# Altium PCB CODEC.PcbDoc
Units mm, origin at the board's own origin, x right, y up, seen from the top; angles counter-clockwise.
Board outline 50.67 x 46.74 mm, 2 copper layers (Top Layer, Bottom Layer); 25 components, 21 nets, 86 pads, 3 vias.
Unrouted connection lines stored in the file: 5.
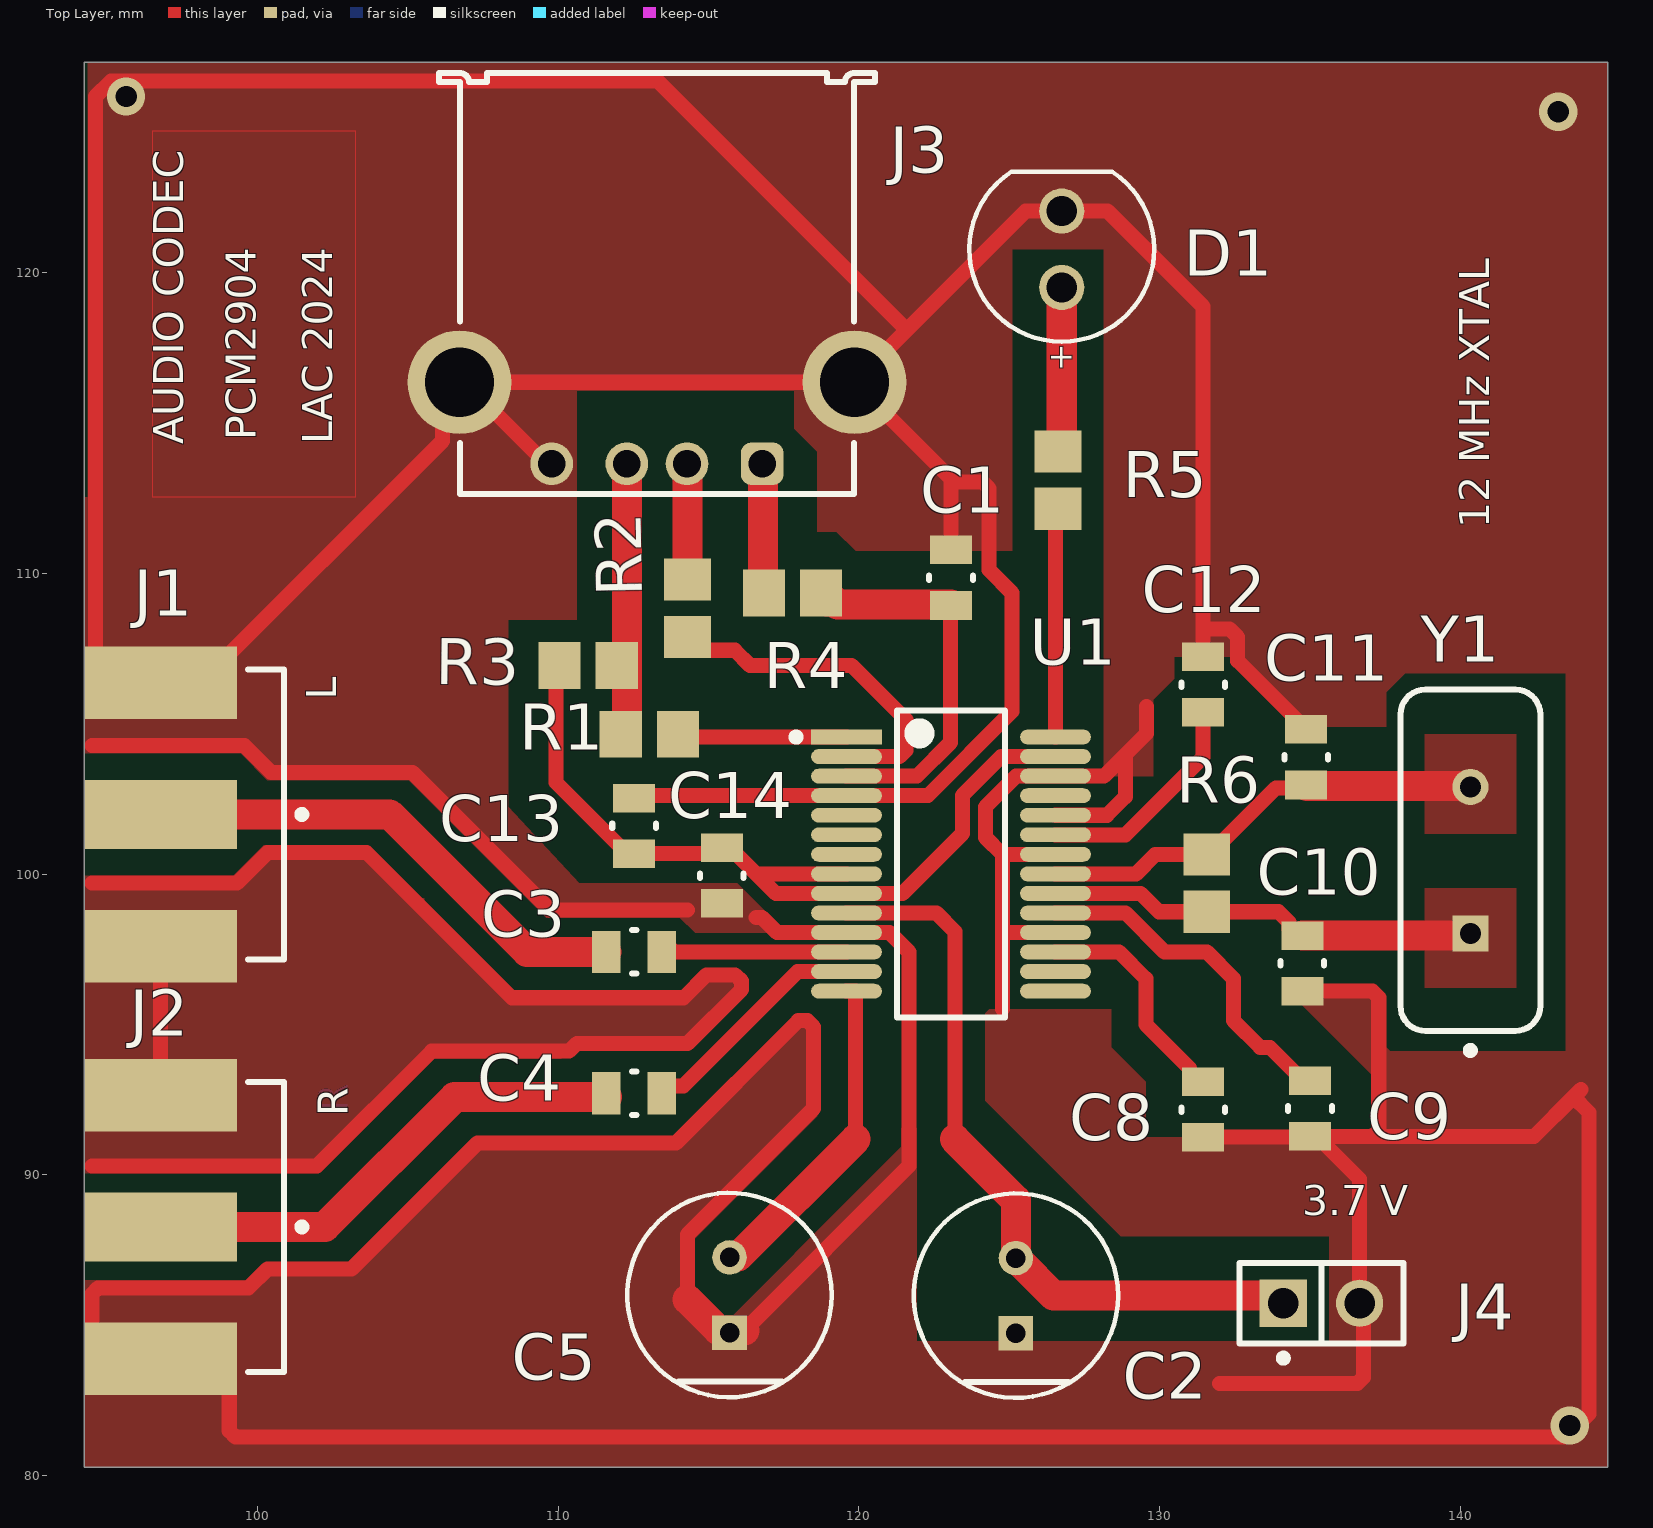
[diagram p0: Top Layer view]
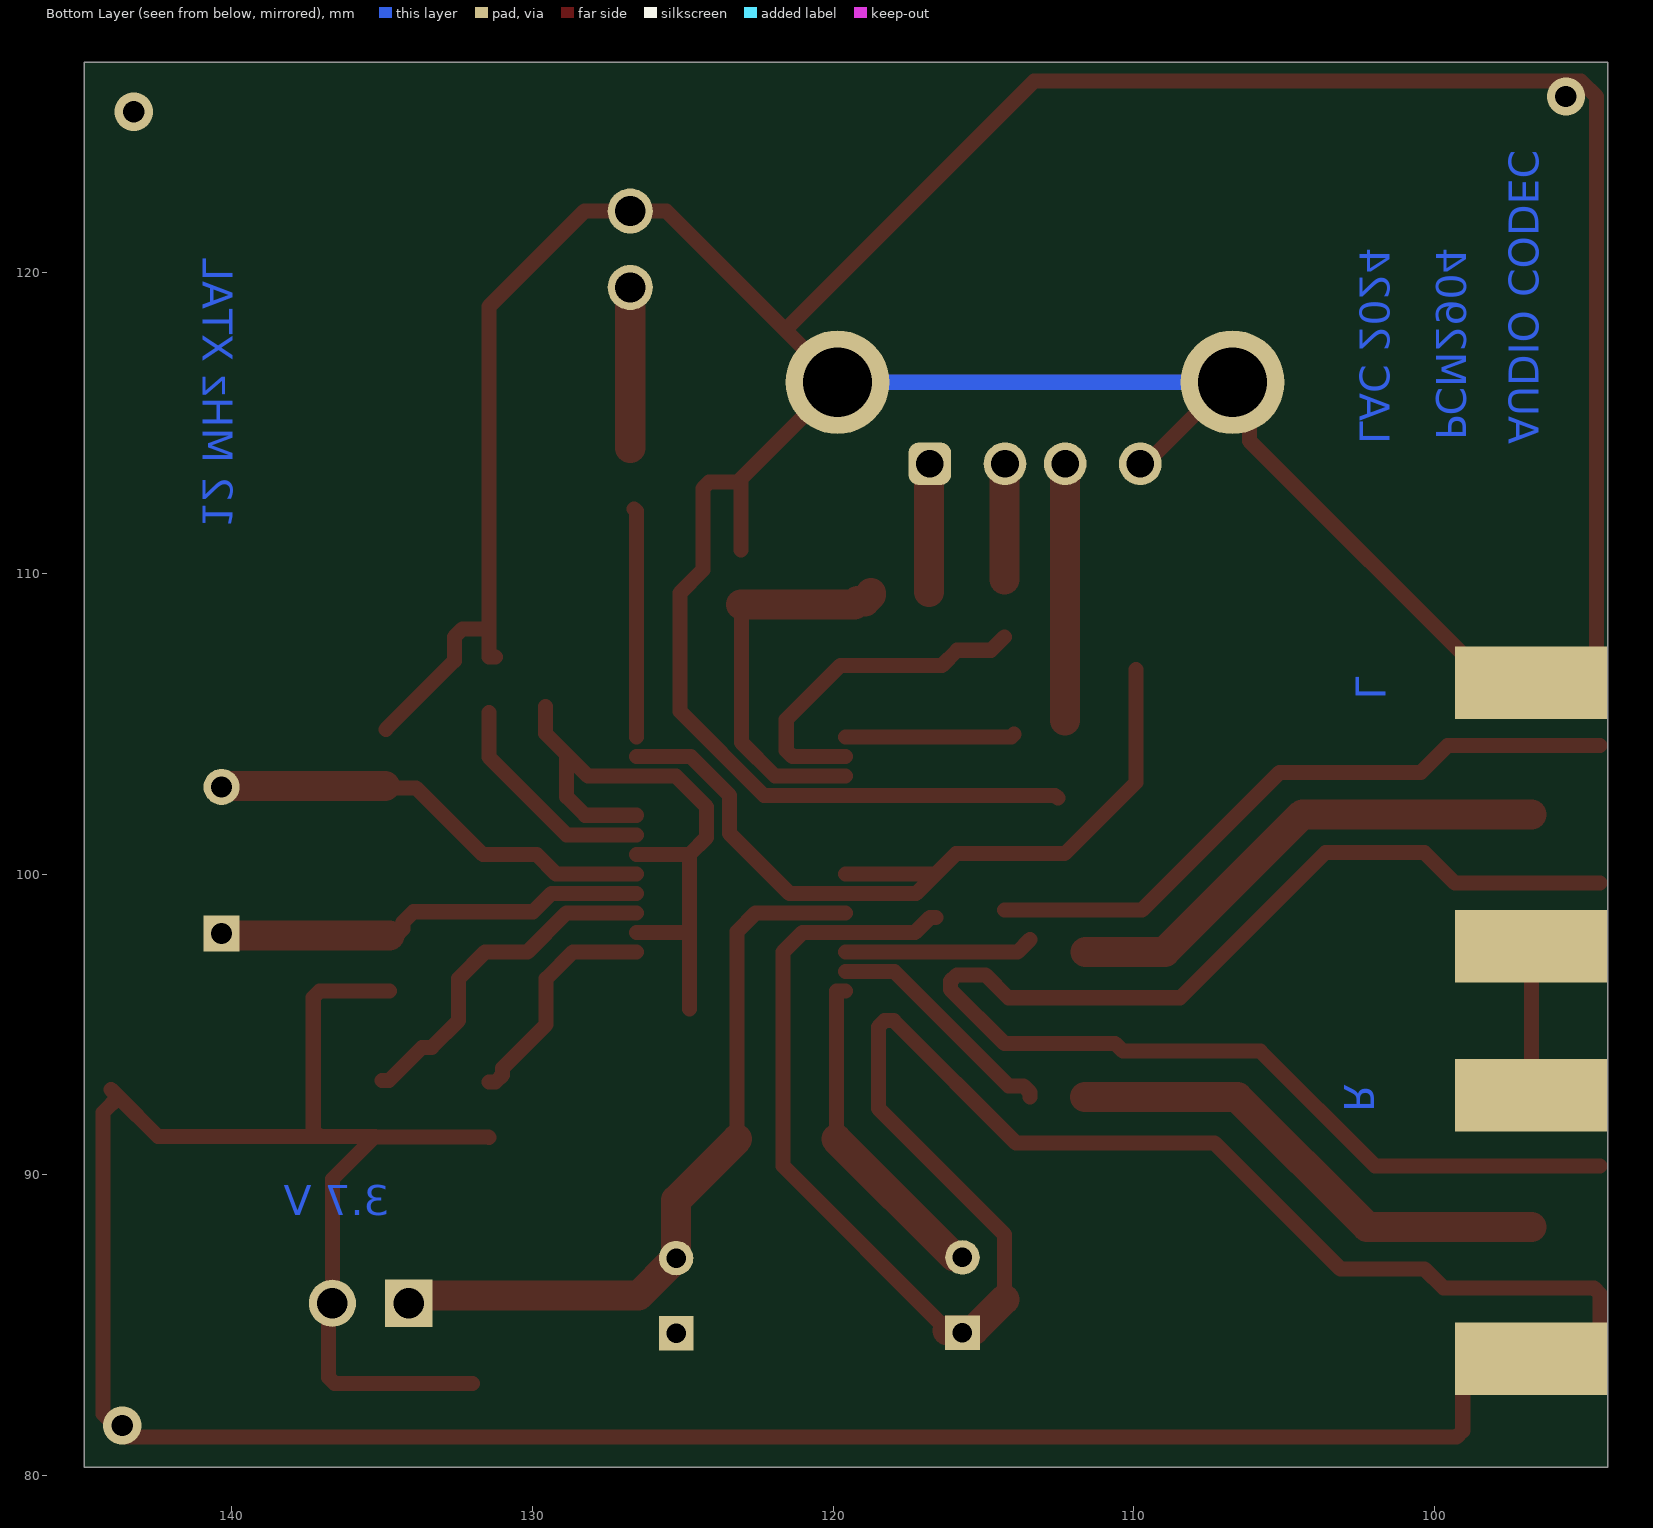
[diagram p1: Bottom Layer view, seen from below]
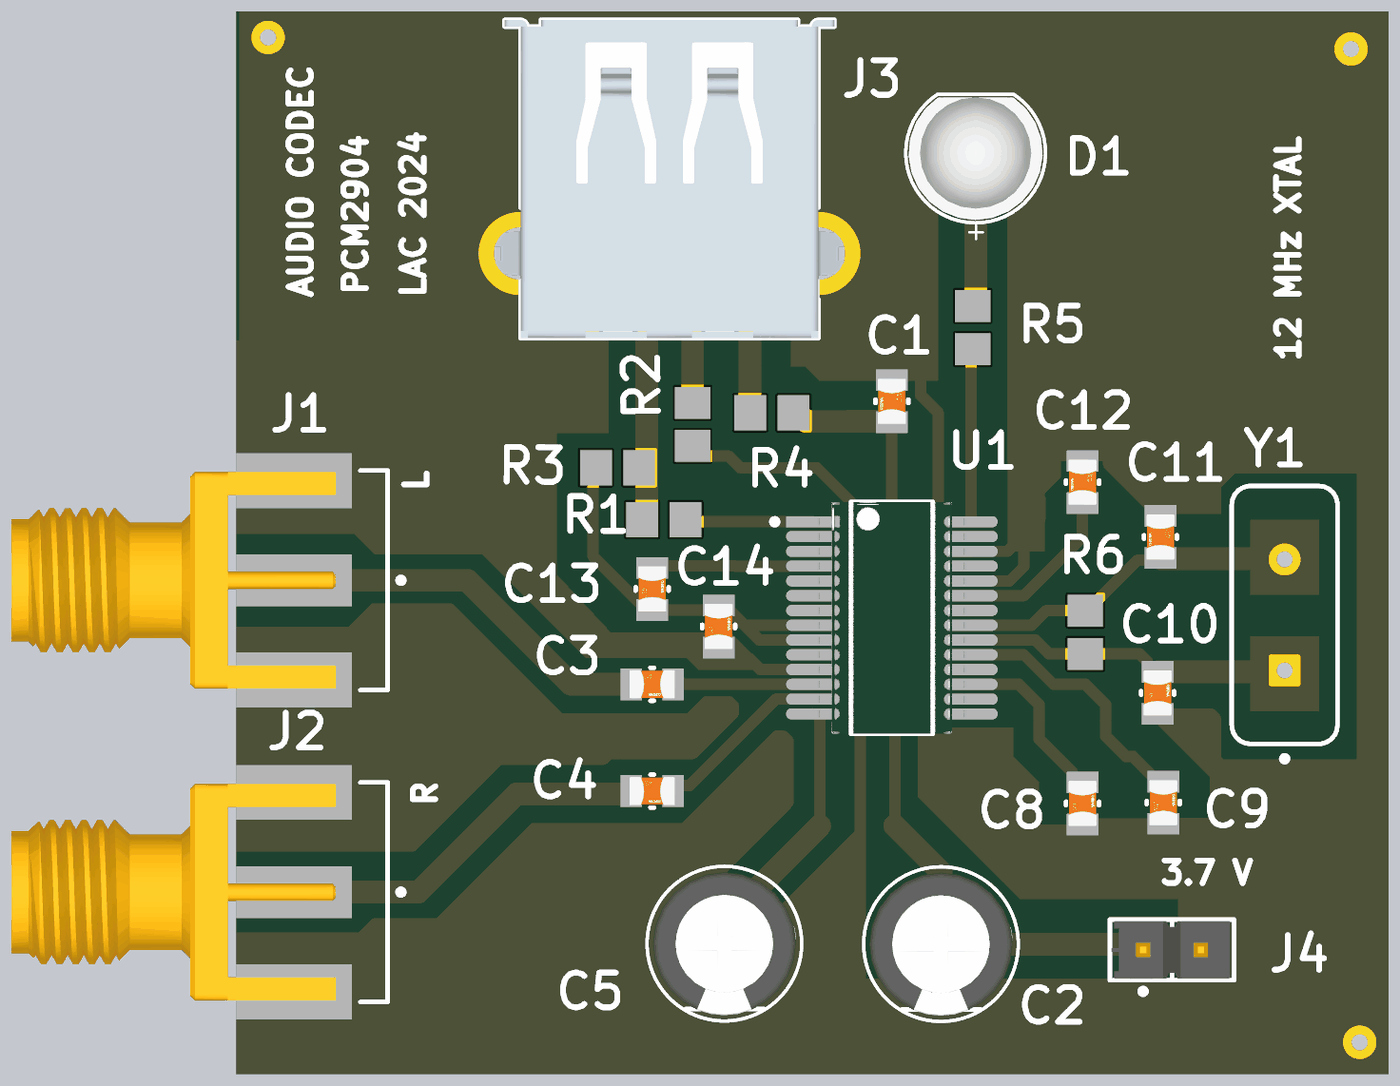
[diagram p2: 3D render of the assembled board from above, using the file's embedded part models]

## Layer stack, top to bottom
Top Solder: solder mask 0.0102, Solder Resist, Dk 3.5
Top Layer: signal copper 0.0356
Dielectric 1: dielectric 0.32, FR-4, Dk 4.8
Bottom Layer: signal copper 0.0356
Bottom Solder: solder mask 0.0102, Solder Resist, Dk 3.5

## Board outline
94.234,80.264 144.907,80.264 144.907,127 94.234,127

## Design rules (kind name [scope] priority, off if disabled: settings)
Clearance Clearance_2 [(ExistsOnLayer('Top Layer') Or ExistsOnLayer('Bottom Layer')) vs (ExistsOnLayer('Top Layer') Or ExistsOnLayer('Bottom Layer'))] p1: gap=0.254 ignorepadtopadclearanceinfootprint=TRUE except(0: Track-Hole SMDPad-Hole THPad-Hole Via-Hole Fill-Hole Poly-Hole Region-Hole Text-Hole; 0.15: Arc-Arc Arc-Track Arc-SMDPad Arc-THPad Arc-Via Arc-Fill Arc-Poly Arc-Region Arc-Text Arc-Hole Track-Track Track-SMDPad Track-THPad Track-Via Track-Fill Track-Poly Track-Region Track-Text)
Clearance [All] p2: gap=0.254 ignorepadtopadclearanceinfootprint=FALSE except(0: Arc-Hole Track-Hole SMDPad-Hole THPad-Hole Via-Hole Fill-Hole Poly-Hole Region-Hole Text-Hole)
HoleToHoleClearance [All] p1: gap=0.2 allowstackedmicrovias=TRUE
MinimumSolderMaskSliver [All] p1: minsoldermaskwidth=0.127
PolygonConnect PolygonConnect_18 [All vs IsNamedPolygon('NETC11_2_L01_P014')] p1: connectstyle=Direct reliefconductorwidth=0.254 reliefentries=4 polygonreliefangle="90 Angle" airgapwidth=0.254
PolygonConnect PolygonConnect_17 [All vs IsNamedPolygon('NETC10_2_L01_P015')] p2: connectstyle=Direct reliefconductorwidth=0.254 reliefentries=4 polygonreliefangle="90 Angle" airgapwidth=0.254
PolygonConnect PolygonConnect_16 [All vs IsNamedPolygon('GND_L01_P013')] p3: connectstyle=Direct reliefconductorwidth=0.254 reliefentries=4 polygonreliefangle="90 Angle" airgapwidth=0.254
PolygonConnect PolygonConnect_15 [All vs IsNamedPolygon('GND_L01_P008')] p4: connectstyle=Direct reliefconductorwidth=0.254 reliefentries=4 polygonreliefangle="90 Angle" airgapwidth=0.254
PolygonConnect PolygonConnect_14 [All vs IsNamedPolygon('GND_L01_P003')] p5: connectstyle=Direct reliefconductorwidth=0.254 reliefentries=4 polygonreliefangle="90 Angle" airgapwidth=0.254
PolygonConnect PolygonConnect_13 [All vs IsNamedPolygon('GND_L01_P007')] p6: connectstyle=Direct reliefconductorwidth=0.254 reliefentries=4 polygonreliefangle="90 Angle" airgapwidth=0.254
PolygonConnect PolygonConnect_12 [All vs IsNamedPolygon('GND_L01_P001')] p7: connectstyle=Direct reliefconductorwidth=0.254 reliefentries=4 polygonreliefangle="90 Angle" airgapwidth=0.254
PolygonConnect PolygonConnect_11 [All vs IsNamedPolygon('GND_L01_P000')] p8: connectstyle=Direct reliefconductorwidth=0.254 reliefentries=4 polygonreliefangle="90 Angle" airgapwidth=0.254
PolygonConnect PolygonConnect_10 [All vs IsNamedPolygon('GND_L01_P009')] p9: connectstyle=Direct reliefconductorwidth=0.254 reliefentries=4 polygonreliefangle="90 Angle" airgapwidth=0.254
PolygonConnect PolygonConnect_9 [All vs IsNamedPolygon('GND_L01_P006')] p10: connectstyle=Direct reliefconductorwidth=0.254 reliefentries=4 polygonreliefangle="90 Angle" airgapwidth=0.254
PolygonConnect PolygonConnect_8 [All vs IsNamedPolygon('GND_L01_P006')] p11: connectstyle=Direct reliefconductorwidth=0.254 reliefentries=4 polygonreliefangle="90 Angle" airgapwidth=0.254
PolygonConnect PolygonConnect_7 [All vs IsNamedPolygon('GND_L01_P006')] p12: connectstyle=Direct reliefconductorwidth=0.254 reliefentries=4 polygonreliefangle="90 Angle" airgapwidth=0.254
PolygonConnect PolygonConnect_6 [All vs IsNamedPolygon('GND_L01_P004')] p13: connectstyle=Direct reliefconductorwidth=0.254 reliefentries=4 polygonreliefangle="90 Angle" airgapwidth=0.254
PolygonConnect PolygonConnect_5 [All vs IsNamedPolygon('GND_L01_P004')] p14: connectstyle=Direct reliefconductorwidth=0.254 reliefentries=4 polygonreliefangle="90 Angle" airgapwidth=0.254
PolygonConnect PolygonConnect_4 [All vs IsNamedPolygon('GND_L01_P002')] p15: connectstyle=Direct reliefconductorwidth=0.254 reliefentries=4 polygonreliefangle="90 Angle" airgapwidth=0.254
PolygonConnect PolygonConnect_3 [All vs IsNamedPolygon('GND_L01_P002')] p16: connectstyle=Direct reliefconductorwidth=0.254 reliefentries=4 polygonreliefangle="90 Angle" airgapwidth=0.254
PolygonConnect PolygonConnect_2 [All vs IsNamedPolygon('GND_L01_P009')] p17: connectstyle=Direct reliefconductorwidth=0.254 reliefentries=4 polygonreliefangle="90 Angle" airgapwidth=0.254
PolygonConnect PolygonConnect_1 [All vs IsNamedPolygon('GND_L01_P000')] p18: connectstyle=Direct reliefconductorwidth=0.254 reliefentries=4 polygonreliefangle="90 Angle" airgapwidth=0.254
PolygonConnect [All] p19: connectstyle=Relief reliefconductorwidth=0.254 reliefentries=4 polygonreliefangle="90 Angle" airgapwidth=0.254
RoutingVias [All] p1: holewidth=0.711 width=1.27 viastyle="Through Hole" minholewidth=0.711 minwidth=1.27 maxholewidth=0.711 maxwidth=1.27
SilkToSilkClearance [All] p1: silktosilkclearance=0.5
SilkToSolderMaskClearance [IsPad] p1: minsilkscreentomaskgap=0.2 clearancetoexposedcopper=TRUE
SolderMaskExpansion [All] p1: expansion=0.102 istentingtop=FALSE
Width MaxMinWidth_1 [All] p1: maxlimit=2 minlimit=0.2 preferedwidth=0.5 minimp=50.000000 maximp=50.000000 favimp=50.000000
Width [All] p2: maxlimit=0.254 minlimit=0.254 preferedwidth=0.254
26 further rules are at their usual default settings.

## Components (designator, comment, footprint, x,y, rotation, side; value= is the part's Value field where it differs from the comment)
C1 "1 uF" FP-CC0805-0_85-MFG 123.063,109.855 r270 top value="100 nF"
C2 "10 uF" FP-RAD-TH-D_6_3_0_5-L_7_1-MFG 125.222,85.979 r90 top
C3 "1 uF" FP-CC0805-0_85-MFG 112.522,97.409 r0 top value="100 nF"
C4 "1 uF" FP-CC0805-0_85-MFG 112.522,92.71 r0 top value="100 nF"
C5 "10 uF" FP-RAD-TH-D_6_3_0_5-L_7_1-MFG 115.697,85.999 r90 top
C8 "1 uF" FP-CC0805-0_85-MFG 131.445,92.166 r90 top value="100 nF"
C9 "1 uF" FP-CC0805-0_85-MFG 135.001,92.202 r90 top value="100 nF"
C10 "10 pF" FP-CC0805-0_85-MFG 134.747,97.028 r90 top value="100 nF"
C11 "10 pF" FP-CC0805-0_85-MFG 134.874,103.886 r270 top value="100 nF"
C12 "1 uF" FP-CC0805-0_85-MFG 131.445,106.299 r270 top value="100 nF"
C13 "1 uF" FP-CC0805-0_85-MFG 112.522,101.6 r90 top value="100 nF"
C14 "1 uF" FP-CC0805-0_85-MFG 115.443,99.949 r90 top value="100 nF"
D1 "151051BS04000" WL-TMRC_D5.9H8.7 126.746,120.777 r90 top
J1 "142-0701-801" FP-142-0701-801-MFG 93.497,101.981 r180 top
J2 "142-0701-801" FP-142-0701-801-MFG 93.497,88.265 r180 top
J3 "61400416021" 61400416021 113.284,119.634 r180 top
J4 "TSW-102-14-G-S" FP-TSW-102-14-G-S-MFG 135.382,85.725 r0 top
R1 "22 Ohm" RESC2013X60X40ML20T25 113.03,104.648 r0 top
R2 "22 Ohm" RESC2013X60X40ML20T25 114.3,108.839 r90 top
R3 "1.5 KOhm" RESC2013X60X40ML20T25 110.998,106.934 r0 top
R4 "2.2" RESC2013X60X40ML20T25 117.79,109.347 r0 top
R5 "1K Ohm" RESC2013X60X40ML20T25 126.619,113.096 r270 top
R6 "1 MOhm" RESC2013X60X40ML20T25 131.572,99.695 r270 top
U1 "PCM2904DB" FP-DB0028A-IPC_A 123.063,100.33 r0 top
Y1 "12 MHz" FOX-FOXSLF160-20 140.335,100.457 r90 top

## Footprints (in the part's own frame and the unit in brackets; to place one, negate y for a bottom-side part, rotate by r counter-clockwise, add the part's x,y. Pads: shape width x height; smd on the part's side, far side on the other; paste and mask are expansions set on the pad)
61400416021 [mm] "USB 2.0 Type A Horizontal"
  rrect50% 1.42x1.42 hole 0.92: 1(-3.5,5.99)
  round 1.42 hole 0.92: 2(-1,5.99) 3(1,5.99) 4(3.5,5.99)
  round 3.45 hole 2.3: Shell(-6.57,3.28) Shell(6.57,3.28)
  silkscreen extent -7.25,-7 7.25,7, body extent -8,-7 8,7, height 7.63
FOX-FOXSLF160-20 [mm] "THD, 2-Leads, Body 11.35x4.65mm"
  rect 1.2x1.2 hole 0.7: 1(-2.44,0)
  round 1.2 hole 0.7: 2(2.44,0)
  silkscreen extent -6.45,-2.32 5.68,2.32, body extent -5.67,-2.32 5.68,2.33, height 3.6
FP-142-0701-801-MFG [mil]
  rect 200x90 smd paste+0 mask+0: 1(-129,0)
  rect 200x95 smd paste+0 mask+0: 2(-129,172.5) 3(-129,-172.5)
  rect 200x95 smd far side paste+0 mask+0: 2(-129,172.5) 3(-129,-172.5)
  silkscreen extent -319,-190 -244,190, body extent -295,-224 295,224, height 10
FP-CC0805-0_85-MFG [mm]
  rect 0.95x1.4 smd paste+0 mask+0: 1(-0.925,0) 2(0.925,0)
  silkscreen extent -0.08,-0.72 0.08,0.72, body extent -1.6,-1.05 1.6,1.05, height 0.25
FP-DB0028A-IPC_A [mm]
  rect 2.353x0.495 smd paste+0 mask+0: 1(-3.475,4.225)
  rrect100% 2.353x0.495 smd paste+0 mask+0: 2(-3.475,3.575) 3(-3.475,2.925) 4(-3.475,2.275) 5(-3.475,1.625) 6(-3.475,0.975) 7(-3.475,0.325) 8(-3.475,-0.325) 9(-3.475,-0.975) 10(-3.475,-1.625) 11(-3.475,-2.275) 12(-3.475,-2.925) 13(-3.475,-3.575) 14(-3.475,-4.225) 15(3.475,-4.225) 16(3.475,-3.575) 17(3.475,-2.925) 18(3.475,-2.275) 19(3.475,-1.625) 20(3.475,-0.975) 21(3.475,-0.325) 22(3.475,0.325) 23(3.475,0.975) 24(3.475,1.625) 25(3.475,2.275) 26(3.475,2.925) 27(3.475,3.575) 28(3.475,4.225)
  silkscreen extent -5.28,-5.1 1.8,5.1, body extent -5.15,-5.6 5.15,5.6, height 0.25
FP-RAD-TH-D_6_3_0_5-L_7_1-MFG [mm]
  rect 1.15x1.15 hole 0.65 paste-2539.97 mask+0: 1(-1.25,0)
  round 1.15 hole 0.65 paste-2539.97 mask+0: 2(1.25,0)
  silkscreen extent -3.4,-3.4 3.4,3.4, body extent -3.5,-3.5 3.5,3.5, height 0.25
FP-TSW-102-14-G-S-MFG [mm]
  rect 1.57x1.57 hole 1.02 paste-2539.97 mask+0: 1(-1.27,0)
  round 1.57 hole 1.02 paste-2539.97 mask+0: 2(1.27,0)
  silkscreen extent -2.73,-1.95 2.73,1.34, body extent -2.83,-1.44 2.83,1.44, height 0.25
RESC2013X60X40ML20T25 [mm] "Chip Resistor, 2-Leads, Body 2.00x1.25mm, IPC Low Density"
  rect 1.4x1.55 smd: 1(-0.95,0) 2(0.95,0)
  body extent -1.1,-0.72 1.1,0.72, height 0.6
WL-TMRC_D5.9H8.7 [mm] "THT Mono-color Round Color LED, 2-leads"
  round 1.5 hole 1: 1(-1.27,0) 2(1.27,0)
  silkscreen extent -3.07,-3.07 2.58,3.08, body extent -2.95,-2.95 2.45,2.95, height 9.2

## Part data
C1 C3 C4 C8 C9 C10 C11 C12 C13 C14: library part CMP-2100-03606-3, "CAP CER 0.1UF 50V X7R 0805", Capacitance="100 nF", Manufacturer=Yageo, Manufacturer Part Number=CC0805KRX7R9BB104, Package=CC0805-0.85, Temperature="-30°C to +85°C", Temperature Characteristic=X7R, Temperature Range High=+85°C, Temperature Range Low=-30°C, Tolerance=0.1, Voltage Rating="50 V", Automotive=No, Category=Cap, ComponentLink2Description=Datasheet, ComponentLink2URL=http://www.yageo.com/documents/recent/UPY-GPHC_Y5V_6.3V-to-50V_8.pdf, Device Class L1="Passive Components", Device Class L2=Capacitors, Device Class L3="Ceramic Capacitors", Digikey Description="CAP CER 0.1UF 50V X7R 0805", Footprint Url=http://www.yageo.com/exep/pages/download/literatures/UPY-C_GEN_24.pdf, Height=0.95mm, Ipc Land Pattern Name=CAPC200125X85, Lead Free=Yes, Material=Ceramic, Mouser Description="Multilayer Ceramic Capacitors MLCC - SMD/SMT 100nF 50V X7R 10%", Octopart=https://octopart.com/cc0805krx7r9bb104-yageo-192993, RoHS=TRUE
C2 C5: library part CMP-05427-001316-1, "Aluminum Electrolytic Capacitors (Radial Lead Type) 100uF ±20% 16V", Capacitance=100uF, Case/Package=Radial, Max Operating Temperature=85°C, Min Operating Temperature=-40°C, Package Quantity=2000, Ripple Current=91mA, Tolerance=20%, Voltage=16V, Diameter=6.3mm, Height=7mm, Height - Seated (Max)=0.315inch, Lead Diameter=0.45mm, Lead Pitch=2.5mm, Length=7mm, Life (Hours)=1000Hour, Mount="Through Hole", Packaging="Tape and Reel", Polarity=Polar, Radiation Hardening=No, RoHS Compliant=Yes, Series=KA, Termination=Radial, Voltage Rating=16V, Voltage Rating (DC)=16V
D1: library part CMP-1488-00009-2, Case/Package=Radial, Color=Blue, Forward Current=100mA, Forward Voltage=3.2V, Max Operating Temperature=85°C, Max Reverse Voltage (DC)=5V, Min Operating Temperature=-40°C, Test Current=20mA, Dominant Wavelength=470nm, Height=8.6mm, Length=5mm, Lens Size=5mm, Lens Style="Circular, Diffused, Round", Luminous Intensity=500mcd, Mount="Through Hole", NexarPartId=29717812, Packaging=Bulk, Peak Wavelength=465nm, REACH SVHC=Unknown, RoHS=Compliant, Viewing Angle=40°, Wavelength=470nm, Width=5mm
J1 J2: library part CMP-09588-000002-1, "CONN SMA JACK STR 50OHM EDGE MNT", Case/Package=SMA, Frequency=18GHz, Max Operating Temperature=165°C, Min Operating Temperature=-65°C, Operating Frequency="0 to 18 GHz", Package Quantity=5, Voltage Rating=335V, Body Material=Brass, Body Plating=Gold, Connector Type=SMA, Contact Material=Copper, Contact Plating=Gold, Depth=25.58mm, Fastening Type=Threaded, Gender=Female, Impedance=50R, Length=0.44inch, Max Frequency=18GHz, Mount=Edge, Orientation=Straight, Packaging=Bulk, Radiation Hardening=No, RoHS Compliant=Yes, Series=SMA, Termination=Solder
J3: library part CMP-1502-03227-2, Color=White, Contact Resistance=20mΩ, Current Rating=1.5A, Flammability Rating="UL94 V-0", Insulation Resistance=1GΩ, Max Operating Temperature=105°C, Min Operating Temperature=-40°C, Operating Supply Voltage=30V, Connector Type=USB, Contact Material=Copper, Contact Plating=Gold, Gender=Receptacle, Insulation Material=PBT, Lead Free="Lead Free", Length=15.8mm, Mount="Horizontal, Through Hole", NexarPartId=21041530, Number of Contacts=4, Number of Pins=4, Number of Ports=1, Number of Positions=4, Orientation=Horizontal, REACH SVHC=Unknown, RoHS=Compliant, Termination=Solder, USB Standard="USB 2.0", Voltage Rating=30V, Voltage Rating (DC)=30V, Width=14.4mm
J4: library part CMP-02766-001740-1, "CONN HEADER VERT 2POS 2.54MM", Color=Black, Flammability Rating="UL94 V-0", Max Current Rating=7.6A, Max Operating Temperature=125°C, Max Voltage Rating (AC)=550V, Min Operating Temperature=-55°C, Package Quantity=1, Connector Type=Header, Contact Finish - Mating=GOLD, Contact Material=Bronze, Contact Mating Length=0.32inch, Contact Plating=Gold, Contact Shape=Square, Contact Type="Male Pin", Depth=2.54mm, Fastening Type=Pull, Gender=Male, Housing Color=Black, Housing Material=Polyester, Insulation Color=Black, Insulation Material=PBT, Lead Free="Lead Free", Length=5.08mm, Mount="Through Hole", Number of Contacts=2, Number of Positions=2, Number of Rows=1, Orientation=Straight, Packaging=Bulk, Pitch=2.54mm, Radiation Hardening=No, REACH SVHC="No SVHC", RoHS Compliant=Yes, Series=TSW, Termination=Solder, Width=2.54mm
R1 R2 R3 R4 R5 R6: library part CMP-2001-00580-1, Manufacturer=Panasonic, Part Number=ERA6AEB101V
U1: library part CMP-04873-000006-1, "IC STEREO AUD CODEC W/USB 28SSOP", Case/Package=SSOP, Max Operating Temperature=85°C, Max Supply Voltage=5.25V, Min Operating Temperature=-25°C, Min Supply Voltage=3.25V, Nominal Supply Current=67mA, Operating Supply Voltage=5V, Package Quantity=47, Height=1.95mm, Interface=USB, Lead Free="Lead Free", Length=10.2mm, Mount="Surface Mount", Number of A/D Converters=1, Number of ADC Channels=2, Number of Analog Inputs=2, Number of Analog Outputs=2, Number of Bits=16, Number of Channels=2, Number of D/A Converters=1, Number of DAC Channels=2, Number of Pins=28, Packaging=Rail/Tube, Radiation Hardening=No, Resolution=16b, RoHS Compliant=Yes, Sampling Rate=48KS/s, Signal to Noise Ratio (SNR)=89dB, Type="General Purpose", Weight=0.010081oz, Width=5.3mm
Y1: library part CMP-1749-00003-1, "Resistance Weld Thru-Hole Crystal, 16 MHz, -20 to 70 degC, 2-Pin THD, RoHS, Bulk", Case\Package=Axial, Max Operating Temperature="155 degC", Min Operating Temperature="-55 degC", Package Quantity=200, Power Rating="250 mW", Resistance="221 kohm", Tolerance=1%, Voltage Rating="250 V", ComponentLink1Description="Manufacturer URL", ComponentLink1URL=http://www.foxonline.com/, ComponentLink2Description=Datasheet, ComponentLink2URL=http://www.foxonline.com/pdfs/hc49slf.pdf, DatasheetVersion=Mar-15, Length="0.248 inch", Mount="Through Hole", PackageDescription="2-Pin Through Hole Device, Body 11.35 x 4.65 mm", PackageReference=FOXSLF160-20, Packaging=Bulk, RoHSCompliant=true

## Via types
v1: diameter 1.27, hole 0.711, Top Layer to Bottom Layer, 3 vias

## Nets (pads, with @x,y where several pads share a name; then routed paths per layer and width w, separated by ;. In a path a pad name is that pad's centre, name@x,y a point inside that pad or via, vN(x,y) a via of type N, cw(c..) or ccw(c..) an arc to the next point about the centre after c; other vN are vias at no path point)
D+: J3.3 R1.1 R3.2 | length 8.5
  Top Layer w1: R1.1@112.284,105.106 112.284,106.426 J3.3
D-: J3.2 R2.2 | length 3.9
  Top Layer w1: J3.2 114.3,113.628 R2.2
GND: C1.1 C2.1 C5.1 C8.1 C9.1 C10.1 C11.1 C12.1 C13.2 C14.1 D1.2 J1.2 J1.3 J2.2 J2.3 J3.4 J3.Shell J4.2 U1.4 U1.11 U1.18 U1.22 U1.24 U1.26 | length 416.8
  Top Layer w0.5: 94.488,90.297 101.981,90.297 105.791,94.107 110.363,94.107 110.617,94.361 114.3,94.361 116.091,96.152 116.091,96.442 115.886,96.647 114.935,96.647 114.173,95.885 108.458,95.885 103.632,100.711 100.33,100.711 99.314,99.695 94.488,99.695 ; 94.488,104.267 99.568,104.267 100.457,103.378 105.156,103.378 109.728,98.806 114.3,98.806 ; J2.3@96.774,92.647 J1.2@96.774,97.599 ; J3.Shell@106.714,116.354 106.15,115.79 106.15,114.405 98.108,106.362 96.774,106.362 95.572,106.362 94.615,107.319 94.615,125.857 95.123,126.365 113.32,126.365 121.593,118.093 ; J3.4 109.604,113.644 106.894,116.354 J3.Shell@119.854,116.354 ; C13.2 112.613,102.616 116.162,102.616 116.173,102.605 U1.4 122.29,102.605 125.095,105.41 125.095,109.347 124.333,110.109 124.333,112.825 124.128,113.03 123.178,113.03 123.063,113.145 ; 114.3,85.852 114.3,88.011 118.491,92.202 118.491,94.918 118.286,95.123 117.983,95.123 113.919,91.059 107.315,91.059 103.124,86.868 100.33,86.868 99.695,86.233 94.693,86.233 94.488,86.028 94.488,83.693 94.678,83.883 96.774,83.883 98.103,83.883 99.06,82.927 99.06,81.485 99.265,81.28 143.51,81.28 144.272,82.042 144.272,92.075 143.764,92.583 ; C5.1@116.193,84.824 121.666,90.297 121.666,97.409 121.02,98.055 U1.11 117.273,98.055 116.776,98.552 116.586,98.552 ; C1.1 123.063,113.145 ; 124.77,95.504 124.77,98.126 ; U1.18 124.841,98.055 124.77,98.126 ; U1.22 124.77,100.655 ; U1.24 128.244,101.955 128.859,102.57 128.859,103.967 ; 129.571,105.575 129.571,104.679 128.859,103.967 ; C12.1@131.22,107.224 C12.1 131.445,118.872 128.27,122.047 D1.2 126.745,122.046 125.546,122.046 121.593,118.093 ; C8.1 131.463,91.259 135.208,91.259 C9.1@135.226,91.277 ; 131.536,108.149 132.331,108.149 132.595,107.885 132.595,107.09 C11.1 ; 131.999,83.058 136.574,83.058 136.779,83.263 136.779,85.598 J4.2 136.652,89.851 C9.1@135.226,91.277 ; C10.1 137.082,96.103 137.287,95.898 137.287,91.482 137.082,91.277 ; 144.018,92.837 143.764,92.583 ; J3.Shell@119.854,116.354 121.593,118.093 ; J3.Shell@119.854,116.354 123.063,113.145 ; 124.77,98.126 124.77,100.655 ; 124.77,100.655 124.206,101.219 124.206,102.235 125.223,103.252 126.536,103.252 U1.26 128.147,103.255 128.859,103.967 ; C9.1@135.226,91.277 137.082,91.277 ; 137.082,91.277 142.458,91.277 143.764,92.583
  Top Layer w1: 114.3,85.852 C5.1@115.316,84.836 ; C5.1@115.622,84.824 C5.1@115.772,84.824 ; C5.1 C5.1@115.772,84.824 ; C5.1@116.193,84.824 C5.1@115.772,84.824
  Bottom Layer w0.5: J3.Shell@106.714,116.354 J3.Shell@119.854,116.354
  other v1: 143.637,81.661 143.256,125.349 95.631,125.857
Lin: C3.1 J1.1 | length 16.7
  Top Layer w1: J1.1 104.394,101.981 108.966,97.409 C3.1
NetC1_2: C1.2 R4.2 U1.3 | length 12.8
  Top Layer w0.5: U1.3 121.924,103.255 123.045,104.376 C1.2@123.045,108.723 ; C1.2 C1.2@123.063,108.969
  Top Layer w1: R4.2 118.74,109.272 118.94,109.072 119.185,109.072 119.291,108.966 121.12,108.966 121.122,108.969 C1.2@123.063,108.969
NetC3_2: C3.2 U1.12 | length 6.3
  Top Layer w0.5: C3.2@113.447,97.819 113.861,97.405 U1.12
NetC4_2: C4.2 U1.13 | length 8
  Top Layer w0.5: C4.2@113.447,92.583 113.447,92.733 113.672,92.958 114.167,92.958 117.964,96.755 U1.13
NetC5_2: C5.2 U1.14 | length 11
  Top Layer w0.5: U1.14 119.59,96.102 119.888,96.102 119.888,91.186
  Top Layer w1: C5.2 115.726,87.278 115.98,87.278 119.888,91.186
NetC8_2: C8.2 U1.17 | length 7.7
  Top Layer w0.5: U1.17 128.655,97.405 129.54,96.52 129.54,94.996 130.995,93.541 130.995,93.316 131.22,93.091 C8.2
NetC9_2: C9.2 U1.19 | length 11.6
  Top Layer w0.5: U1.19 128.87,98.705 130.166,97.409 131.572,97.409 132.461,96.52 132.461,95.123 133.346,94.238 133.665,94.238 134.776,93.127 C9.2
NetC10_2: C10.2 R6.2 U1.20 Y1.1 | length 14.4
  Top Layer w0.5: U1.20 129.372,99.355 129.982,98.745 R6.2 133.955,98.745 134.297,98.403 134.297,98.178 134.522,97.953 C10.2
  Top Layer w1: C10.2 Y1.1@140.271,97.953
NetC11_2: C11.2 R6.1 U1.21 Y1.2 | length 14.8
  Top Layer w0.5: U1.21 129.215,100.005 129.855,100.645 R6.1 131.647,100.645 133.865,102.863 C11.2@134.649,102.863 ; C11.2 C11.2@134.906,102.929 ; Y1.2@140.303,102.929 Y1.2
  Top Layer w1: C11.2@134.906,102.929 Y1.2@140.303,102.929
NetC12_2: C12.2 U1.23 | length 7.5
  Top Layer w0.5: U1.23 128.864,101.305 131.445,103.886 C12.2
NetC13_1: C13.1 C14.2 R3.1 U1.8 U1.9 U1.27 | length 27.5
  Top Layer w0.5: R3.1@109.921,106.807 109.921,103.051 112.297,100.675 C13.1 115.916,100.675 116.586,100.005 ; U1.8 116.586,100.005 ; U1.27 124.733,103.905 123.444,102.616 123.444,101.346 121.453,99.355 U1.9 117.236,99.355 116.586,100.005
NetD1_1: D1.1 R5.1 | length 5.5
  Top Layer w0.5: R5.1 R5.1@126.746,114.173
  Top Layer w1: R5.1@126.746,114.173 D1.1
NetR1_2: R1.2 U1.1 | length 5.6
  Top Layer w0.5: R1.2 114.073,104.555 U1.1
NetR2_1: R2.1 U1.2 | length 11.5
  Top Layer w0.5: R2.1 114.747,107.442 115.873,107.442 116.381,106.934 119.761,106.934 121.558,105.137 121.558,104.11 121.353,103.905 U1.2
NetR5_2: R5.2 U1.28 | length 7.6
  Top Layer w0.5: U1.28 126.538,112.065 R5.2
Rin: C4.1 J2.1 | length 16.8
  Top Layer w0.5: J2.1 J2.1@96.901,88.392
  Top Layer w1: J2.1 102.235,88.265 106.553,92.583 C4.1@111.626,92.583
V5: J3.1 R4.1 | length 4.3
  Top Layer w0.5: J3.1 J3.1@116.812,113.616 ; R4.1@116.812,109.375 R4.1
  Top Layer w1: R4.1@116.812,109.375 J3.1@116.812,113.616
VCCCI: C2.2 J4.1 U1.10 | length 25.1
  Top Layer w0.5: U1.10 122.578,98.705 123.19,98.093 123.19,91.186 ; C2.2 C2.2@125.329,87.122
  Top Layer w1: 123.19,91.186 125.222,89.154 C2.2 ; C2.2@125.329,87.122 126.472,85.979 133.858,85.979 J4.1
pads on no net: U1.5 U1.6 U1.7 U1.15 U1.16 U1.25

## Polygon pours and split planes (outlines as drawn)
NetC10_2 on Top Layer "NETC10_2_L01_P015" (solid, pour order 15): 138.811,99.522 141.859,99.522 141.859,96.22 138.811,96.22
NetC11_2 on Top Layer "NETC11_2_L01_P014" (solid, pour order 14): 138.811,104.648 141.859,104.648 141.859,101.346 138.811,101.346
GND on Top Layer "GND_L01_P013" (solid, pour order 13): 137.033,93.345 134.747,95.631 134.747,96.103 137.082,96.103 137.287,95.898 137.287,93.345
GND on Top Layer "GND_L01_P011" (solid, pour order 11): 128.143,107.224 128.147,107.22 128.147,103.255 129.79,103.255 129.794,103.251 129.794,105.798 131.22,107.224
GND on Top Layer "GND_L01_P000" (solid, pour order 0): 94.361,127 94.361,105.283 99.06,105.283 99.187,105.156 102.489,108.458 110.617,108.458 110.617,116.078 117.856,116.078 117.856,114.808 118.618,114.046 118.618,111.379 119.253,111.379 119.888,110.744 125.095,110.744 125.095,120.777 144.907,120.777 144.907,127
no net on Top Layer "NONET_L01_P010" (solid, pour order 10): 96.52,124.714 103.251,124.714 103.251,112.522 96.52,112.522
GND on Top Layer "GND_L01_P002" (solid, pour order 2): 128.143,120.777 128.143,107.224 132.588,107.224 134.91,104.902 137.541,104.902 137.541,106.045 138.176,106.68 143.51,106.68 143.51,80.264 144.907,80.264 144.907,120.777
GND on Top Layer "GND_L01_P003" (solid, pour order 3): 94.234,80.264 144.907,80.264 144.907,82.042 142.494,84.455 94.234,84.455
GND on Top Layer "GND_L01_P004" (solid, pour order 4): 125.421,91.241 137.046,91.241 137.046,94.729 137.668,94.107 143.51,94.107 143.764,94.361 144.907,94.361 144.907,83.058 135.636,83.058 135.636,84.709 135.636,87.947 128.714,87.947
GND on Top Layer "GND_L01_P005" (solid, pour order 5): 125.73,90.932 124.206,92.456 124.206,95.377 124.333,95.504 128.397,95.504 128.397,94.234 129.54,93.091 129.54,91.313 129.159,90.932
GND on Top Layer "GND_L01_P006" (solid, pour order 6): 121.92,91.567 121.92,83.439 114.681,83.439 114.3,83.82 121.412,90.932 121.412,91.567
GND on Top Layer "GND_L01_P007" (solid, pour order 7): 94.234,82.042 94.234,86.487 99.949,86.487 100.33,86.868 103.124,86.868 107.315,91.059 113.919,91.059 117.983,95.123 118.413,95.123 118.618,94.918 118.618,91.948 114.3,87.63 114.3,86.233 118.491,82.042
GND on Top Layer "GND_L01_P008" (solid, pour order 8): 94.234,99.949 99.187,99.949 100.203,100.965 103.632,100.965 108.585,96.012 114.3,96.012 114.808,96.52 114.911,96.417 115.862,96.417 115.862,96.273 115.964,96.17 114.155,94.361 110.617,94.361 110.109,93.853 94.488,93.853 94.234,94.107
GND on Top Layer "GND_L01_P009" (solid, pour order 9): 94.234,104.013 99.441,104.013 100.33,103.124 105.029,103.124 109.601,98.552 114.046,98.552 114.554,98.044 116.967,98.044 116.967,98.679 115.951,99.695 110.696,99.695 108.331,102.235 108.331,112.522 94.234,112.522
GND on Top Layer "GND_L01_P001" (solid, pour order 1): 94.234,99.187 105.537,99.187 105.537,93.599 101.981,90.043 94.234,90.043

## Other copper
Bottom Layer:
  text "PCM2904" at 99.949,114.427 h1 r90
  text "AUDIO CODEC" at 97.536,114.3 h1 r90
  text "LAC 2024" at 102.489,114.3 h1 r90
  text "12 MHz XTAL" at 140.97,111.506 h1 r90
  text "L" at 102.616,105.791 h1 r90
  text "R" at 102.997,92.075 h1 r90
  text "3.7 V" at 134.747,88.646 h1

## Silkscreen, mask and mechanical layers (free items; w line width, h text height)
Top Overlay:
  text "PCM2904" at 99.949,114.427 h1 r90
  text "AUDIO CODEC" at 97.536,114.3 h1 r90
  text "LAC 2024" at 102.489,114.3 h1 r90
  text "12 MHz XTAL" at 140.97,111.506 h1 r90
  text "L" at 102.616,105.791 h1 r90
  text "R" at 102.997,91.948 h1 r90
  text "3.7 V" at 134.747,88.646 h1

## Text inside footprints (layer, text, board x,y; h text height)
D1: Top Overlay "+" at 127.076,116.727 h0.8 r90
J3: Mechanical 2 "PCB Edge" at 115.484,127.854 h0.81 r180